# Altium PCB PCB1.PcbDoc
Units mil, origin at the board's own origin, x right, y up, seen from the top; angles counter-clockwise.
Board outline 1195 x 1580 mil, 2 copper layers (Top Layer, Bottom Layer); 29 components, 20 nets, 171 pads, 89 vias.
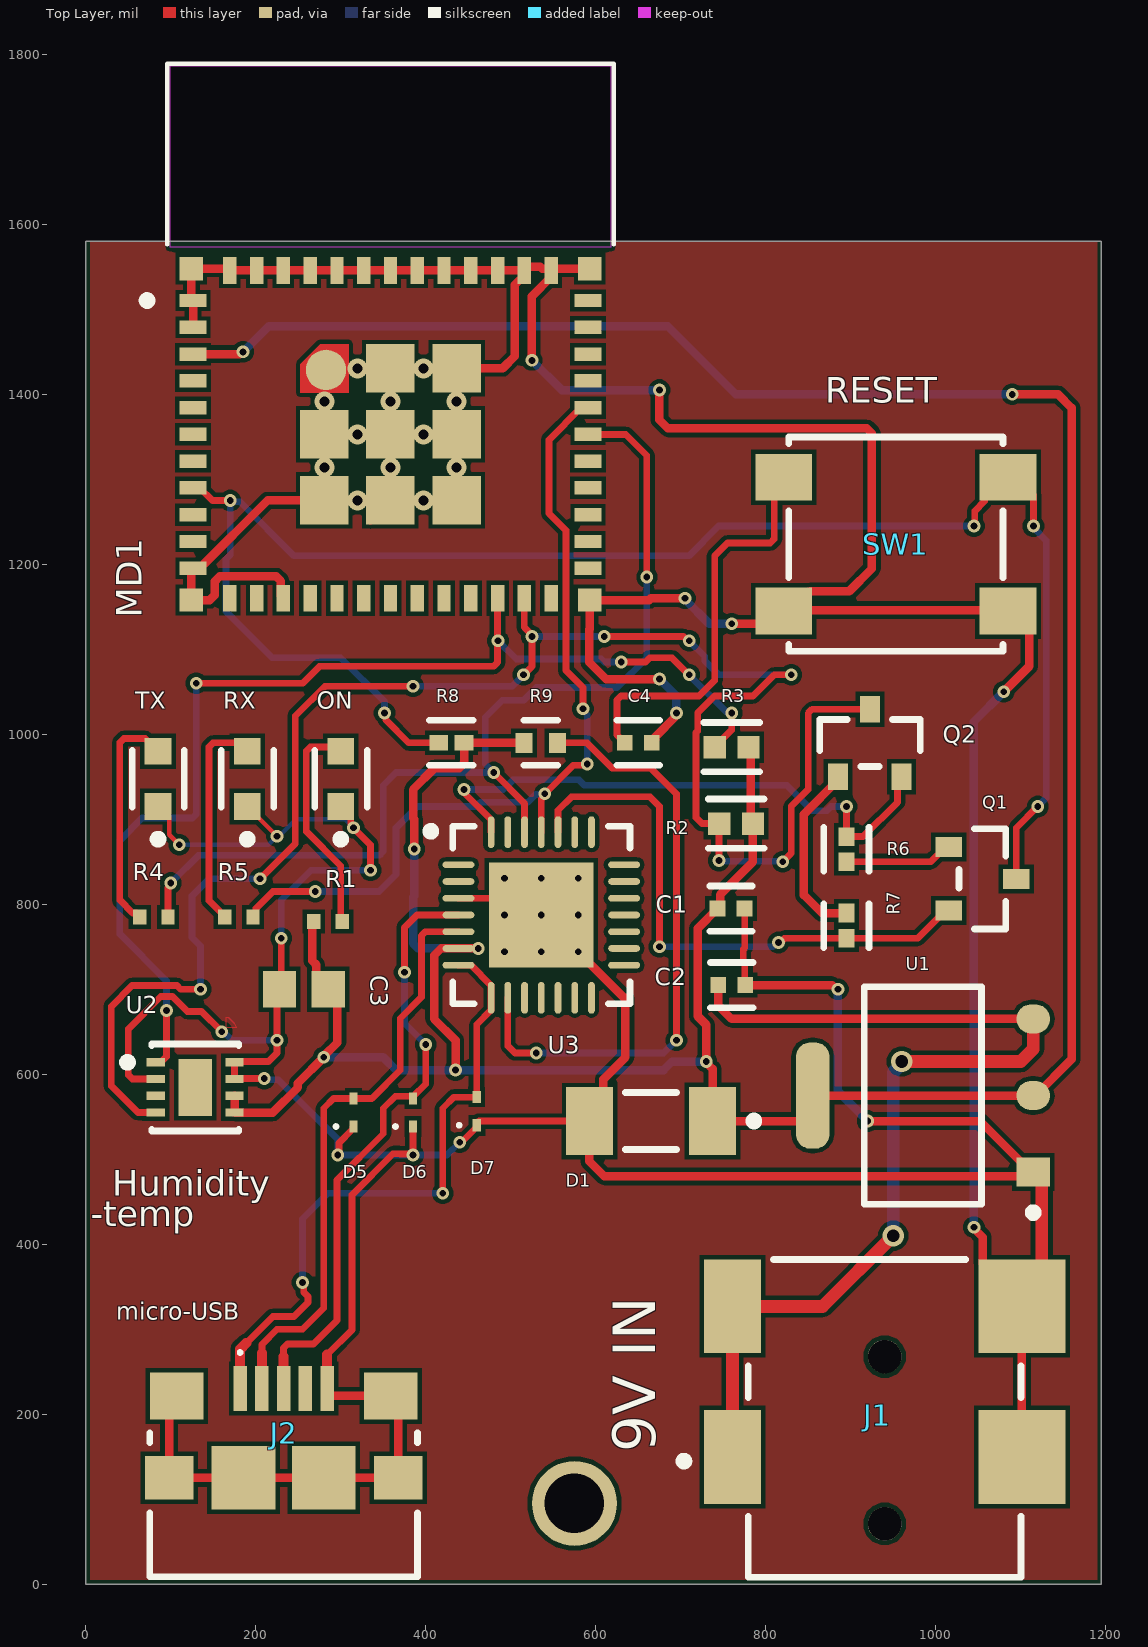
[diagram p0: Top Layer view]
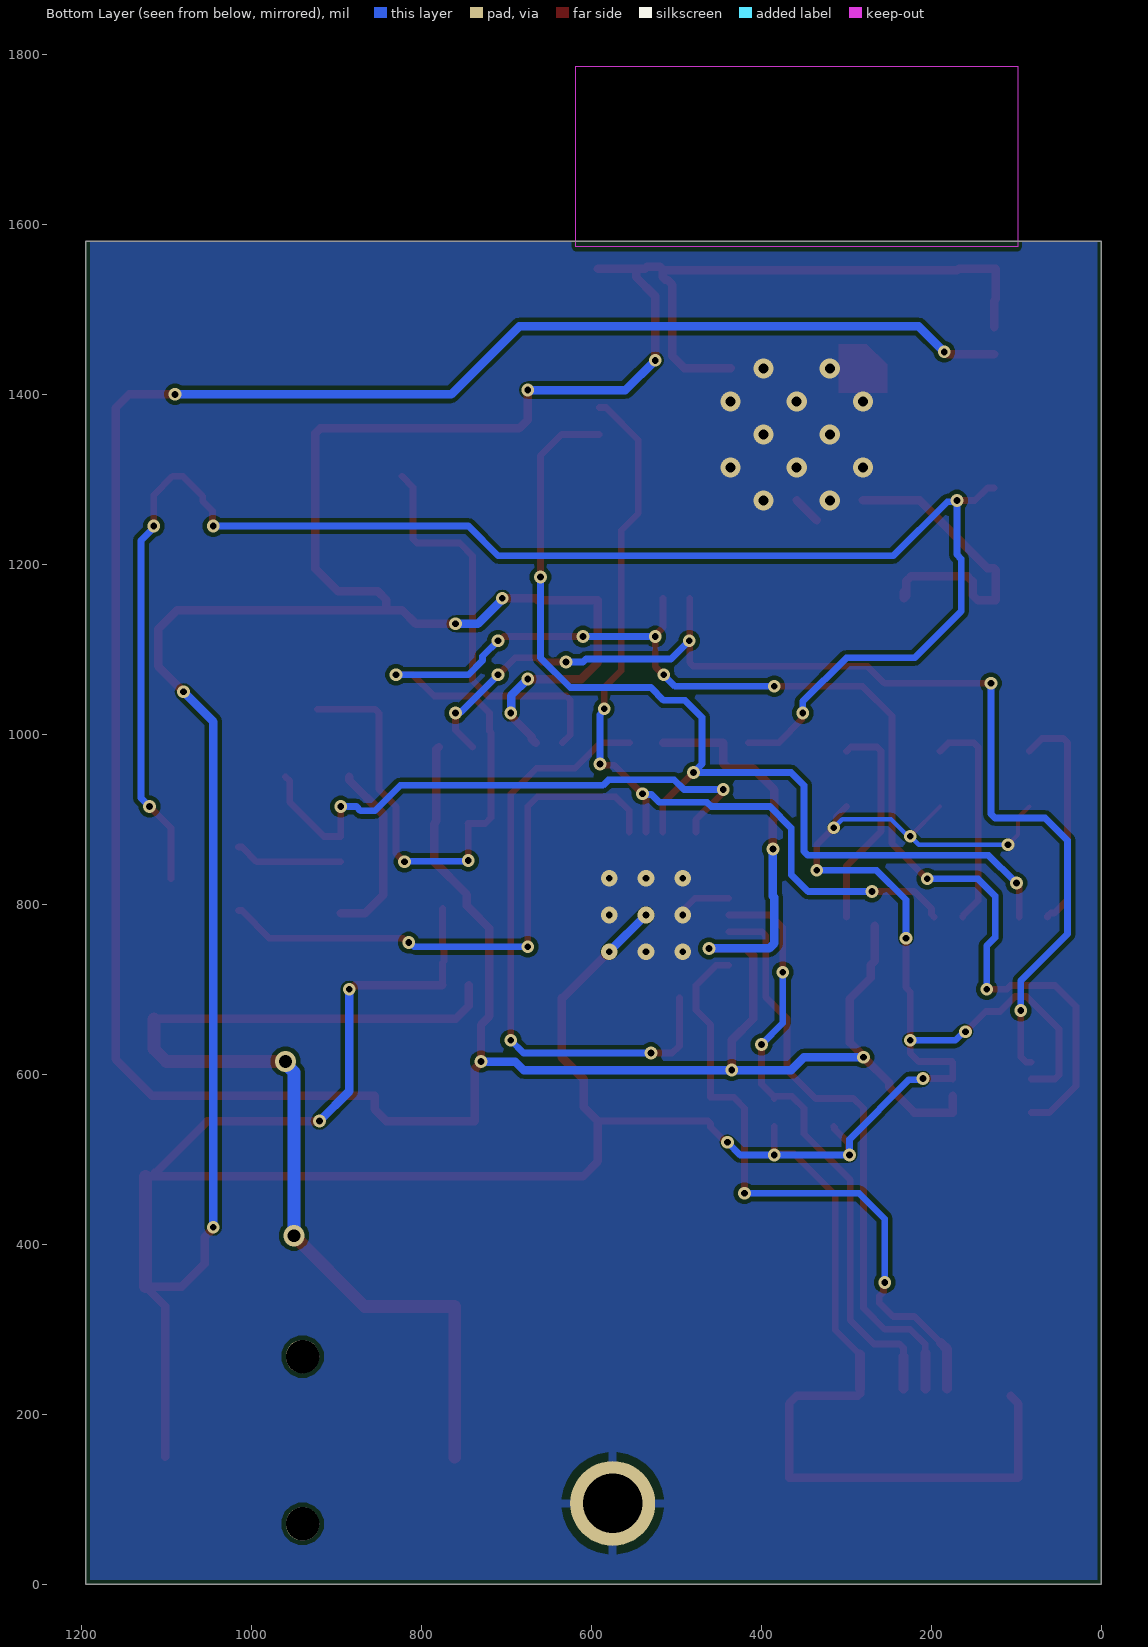
[diagram p1: Bottom Layer view, seen from below]
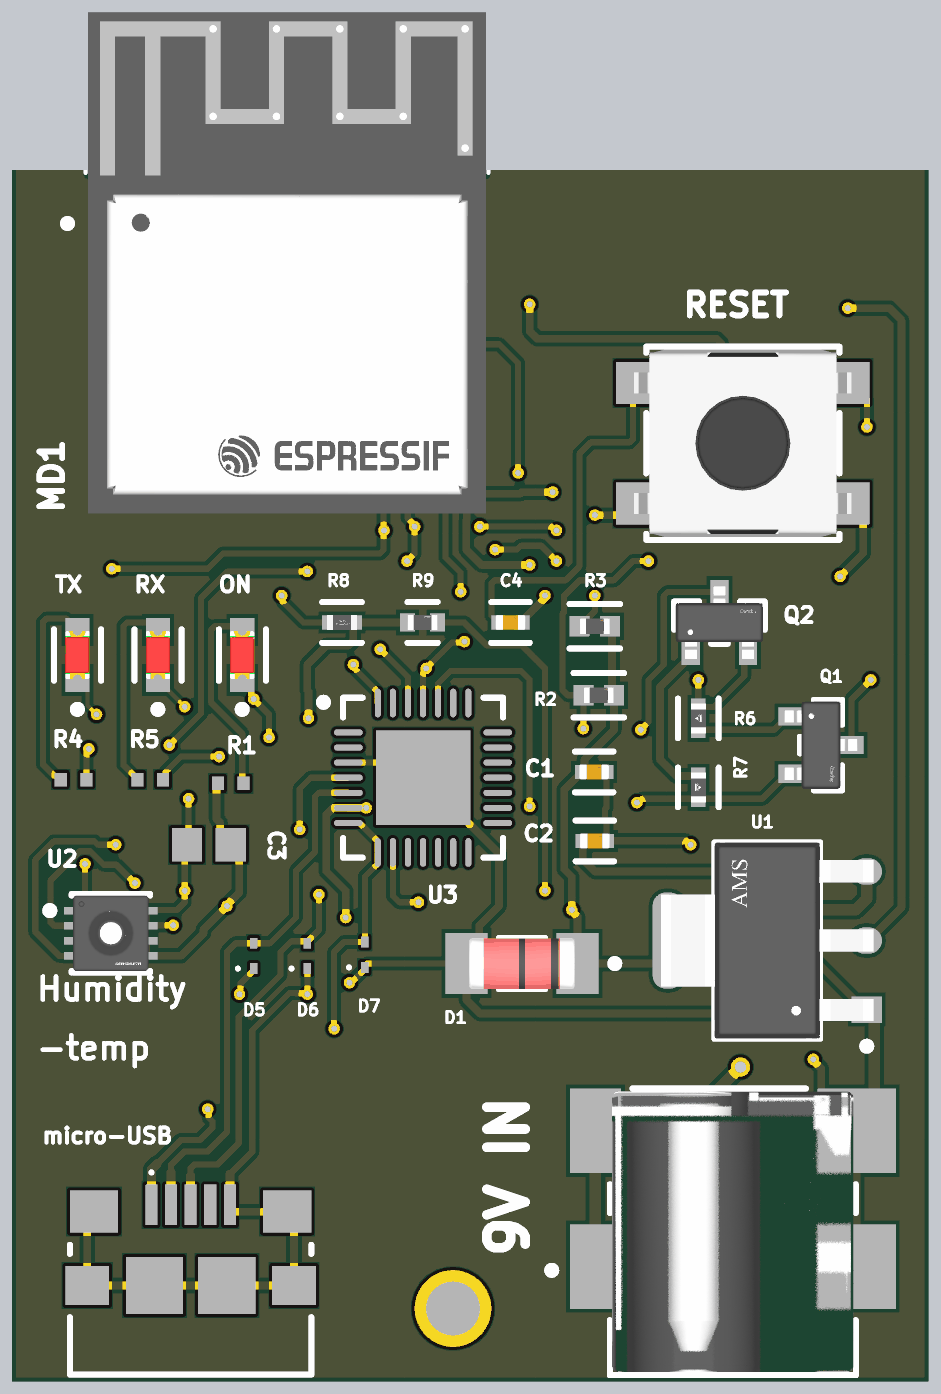
[diagram p2: 3D render of the assembled board from above, using the file's embedded part models]

## Layer stack, top to bottom
Top Solder: solder mask 0.4, Solder Resist, Dk 3.5
Top Layer: signal copper 1.4
Dielectric 1: dielectric 12.6, FR-4, Dk 4.8
Bottom Layer: signal copper 1.4
Bottom Solder: solder mask 0.4, Solder Resist, Dk 3.5

## Board outline
0,0 1195,0 1195,1580 0,1580

## Design rules (kind name [scope] priority, off if disabled: settings)
Clearance Clearance_2 [InNamedPolygon('Bottom Layer-No Net') vs InNet('No Net') And OnLayer('Top Layer')] p1: gap=5 ignorepadtopadclearanceinfootprint=FALSE
Clearance Clearance_1 [InNamedPolygon('Bottom Layer-No Net')] p2: gap=5 ignorepadtopadclearanceinfootprint=FALSE
Clearance [All] p3: gap=5 ignorepadtopadclearanceinfootprint=FALSE
PlaneClearance [InPadClass('All Pads')] p1: clearance=20
PlaneConnect [All] p1: planeconnectstyle=Direct reliefexpansion=20 reliefentries=4 reliefconductorwidth=10 reliefairgap=10
PolygonConnect [All] p1: connectstyle=NoConnect reliefconductorwidth=10 reliefentries=4 polygonreliefangle="90 Angle" airgapwidth=10
RoutingPriority [InNet('3.3v')] p1: routingpriority=0
RoutingVias [All] p1: holewidth=20 width=30 viastyle="Through Hole" minholewidth=5 minwidth=10 maxholewidth=30 maxwidth=50
SolderMaskExpansion [All] p1: expansion=4 istentingtop=FALSE
SupplyNets "Schematic Supply Nets" [InNet('GND')] p1: voltage=0.000
UnpouredPolygon [All] p1: allowunpoured=TRUE
Width [All] p1: maxlimit=100 minlimit=5 preferedwidth=10 minimp=50.000000 maximp=50.000000 favimp=50.000000
26 further rules are at their usual default settings.

## Components (designator, comment, footprint, x,y, rotation, side; value= is the part's Value field where it differs from the comment)
C1 "0.1uf" FP-0402B104K160CT-IPC_C 759.13,795 r0 top
C2 "0402B104K160CT" FP-0402B104K160CT-IPC_C 760,705 r0 top
C3 "0.1uf" CAPC1608X87X35ML15T15 256.46,700 r0 top
C4 "0.1uf" FP-0402B104K160CT-IPC_C 650,990 r0 top
D1 "JANTX1N746AUR-1" FP-DO-213AA-MFG 665,545 r180 top
D5 "ESD9B5.0ST5G" ONSC-SOD-923-2-514AB-01_V 315,555 r90 top
D6 "ESD9B5.0ST5G" ONSC-SOD-923-2-514AB-01_V 385,555 r90 top
D7 "ESD9B5.0ST5G" ONSC-SOD-923-2-514AB-01_V 460,556.54 r90 top
J1 "PJ-018H-SMT-TR" FP-PJ-018H-SMT-TR-MFG 940,195 r90 top
J2 "1981568-1" TECO-1981568-5_V 232.76,230.32 r0 top
MD1 "ESP32-C3-MINI-1-N4" FP-ESP32-C3-MINI-1-N4-MFG 358.5,1352.91 r0 top
ON "SML-D12U1WT86" FP-SML-D12-MFG 300,947.48 r90 top (schematic designator D2)
Q1 "SS8050-G" FP-SS8050-G-MFG 1055,830 r0 top
Q2 "SS8050-G" FP-SS8050-G-MFG 922.6,989.76 r90 top
R1 "RL0510S-R15-F" RESC1005X45X15LL05T10 285,780 r0 top
R2 "4.7K" FP-TFCR0402-IPC_A 765.17,895 r0 top
R3 "4.7K" FP-TFCR0402-IPC_A 760,985 r0 top
R4 "" RESC1005X45X15LL05T10 80,785 r180 top
R5 "RL0510S-R15-F" RESC1005X45X15LL05T10 180,785 r180 top
R6 "10K" FP-CRCW0402-C-e3-IPC_C 895,864.81 r270 top
R7 "10K" FP-CRCW0402-C-e3-IPC_C 895,774.81 r90 top
R8 "CRGCQ0402J10K" FP-CRGCQ0402-IPC_C 430.19,990 r0 top value=10KΩ
R9 "4.7k" FP-RC0402-0_4-MFG 535.32,990 r0 top
RX "SML-D12U1WT86" FP-SML-D12-MFG 190,947.48 r90 top (schematic designator D4)
SW1 "430473035826" 430473035826 953.11,1223.74 r180 top
TX "SML-D12U1WT86" FP-SML-D12-MFG 85,947.48 r90 top (schematic designator D3)
U1 "AMS1117-3.3" FP-AMS1117-IPC_C 985,575 r180 top
U2 "SHT30-DIS-B2.5KS" FP-SHT30-DIS-B2_5KS-MFG 128.74,584.53 r0 top
U3 "CP2102-GMR" SLAB-QFN-28-3125x3125TP_M 535.94,787.44 r0 top

## Footprints (in the part's own frame and the unit in brackets; to place one, negate y for a bottom-side part, rotate by r counter-clockwise, add the part's x,y. Pads: shape width x height; smd on the part's side, far side on the other; paste and mask are expansions set on the pad)
430473035826 [mm] "SMD Tact Switch, body 6x6mm"
  rect 1.7x1.4 smd: A1(-3.35,2) A2(3.35,2) B1(-3.35,-2) B2(3.35,-2)
  silkscreen extent -3.2,-3.2 3.2,3.2, body extent -3.6,-3.1 3.6,3.1, height 3.5
CAPC1608X87X35ML15T15 [mm] "Chip Capacitor, 2-Leads, Body 1.60x0.80mm, IPC Low Density"
  rect 1x1.1 smd: 1(-0.725,0) 2(0.725,0)
  body extent -0.87,-0.48 0.87,0.47, height 0.87
FP-0402B104K160CT-IPC_C [mil]
  rect 18.36x18.6 smd paste+0 mask+0: 1(-15.87,0) 2(15.87,0)
  silkscreen extent -25,-27 25,27, body extent -29,-15 29,15, height 10
FP-AMS1117-IPC_C [mm]
  rect 1.004x0.872 smd paste+0 mask+0: 1(-3.295,2.29)
  rrect100% 1.004x0.872 smd paste+0 mask+0: 2(-3.295,0) 3(-3.295,-2.29)
  rrect87% 1.004x3.182 smd paste+0 mask+0: 4(3.295,0)
  silkscreen extent -3.42,-3.25 1.75,3.62, body extent -3.9,-3.35 3.9,3.35, height 0.25
FP-CRCW0402-C-e3-IPC_C [mil]
  rect 22.03x18.6 smd paste+0 mask+0: 1(-14.81,0) 2(14.81,0)
  silkscreen extent -26,-27 26,27, body extent -30,-15 30,15, height 10
FP-CRGCQ0402-IPC_C [mil]
  rect 22.03x18.6 smd paste+0 mask+0: 1(-14.81,0) 2(14.81,0)
  silkscreen extent -26,-27 26,27, body extent -30,-15 30,15, height 10
FP-DO-213AA-MFG [mm]
  rect 1.4x2.03 smd paste+0 mask+0: 1(-1.84,0) 2(1.84,0)
  silkscreen extent -3.2,-0.85 0.76,0.85, body extent -2.64,-1.11 2.64,1.11, height 0.25
FP-ESP32-C3-MINI-1-N4-MFG [mm]
  rect 0.8x0.4 smd paste+0 mask+0: 1(-5.9,4) 2(-5.9,3.2) 3(-5.9,2.4) 4(-5.9,1.6) 5(-5.9,0.8) 6(-5.9,0) 7(-5.9,-0.8) 8(-5.9,-1.6) 9(-5.9,-2.4) 10(-5.9,-3.2) 11(-5.9,-4) 25(5.9,-4) 26(5.9,-3.2) 27(5.9,-2.4) 28(5.9,-1.6) 29(5.9,-0.8) 30(5.9,0) 31(5.9,0.8) 32(5.9,1.6) 33(5.9,2.4) 34(5.9,3.2) 35(5.9,4)
  rect 0.4x0.8 smd paste+0 mask+0: 12(-4.8,-4.9) 13(-4,-4.9) 14(-3.2,-4.9) 15(-2.4,-4.9) 16(-1.6,-4.9) 17(-0.8,-4.9) 18(0,-4.9) 19(0.8,-4.9) 20(1.6,-4.9) 21(2.4,-4.9) 22(3.2,-4.9) 23(4,-4.9) 24(4.8,-4.9) 36(4.8,4.9) 37(4,4.9) 38(3.2,4.9) 39(2.4,4.9) 40(1.6,4.9) 41(0.8,4.9) 42(0,4.9) 43(-0.8,4.9) 44(-1.6,4.9) 45(-2.4,4.9) 46(-3.2,4.9) 47(-4,4.9) 48(-4.8,4.9)
  rect 1.45x1.45 smd paste+0 mask+0: 49(-1.975,-1.975) 49(-1.975,0) 49(0,-1.975) 49(0,0) 49(0,1.975) 49(1.975,-1.975) 49(1.975,0) 49(1.975,1.975)
  round 1.207 smd paste+0 mask+0: 49(-1.926,1.926)
  rect 0.7x0.7 smd paste+0 mask+0: 50(5.95,4.95) 51(5.95,-4.95) 52(-5.95,-4.95) 53(-5.95,4.95)
  Top Layer region: -2.7,1.25 -2.7,2.1 -2.1,2.7 -1.25,2.7 -1.25,1.25
  Keep-Out Layer region: -6.6,5.6 6.6,5.6 6.6,11 -6.6,11
  silkscreen extent -7.4,3.88 6.67,11.08, body extent -6.78,-5.77 6.78,11.17, height 0.25
FP-PJ-018H-SMT-TR-MFG [mm]
  rect 2.8x1.7 smd paste+0 mask+0: 1(-1.15,4.55) 1(3.35,4.55)
  rect 2.8x2.6 smd paste+0 mask+0: 2(-1.15,-4.1) 3(3.35,-4.1)
  round 1 hole 1 unplated paste-2539.97 mask+0: ""(-3.15,0) ""(1.85,0)
  silkscreen extent -4.75,-4.08 4.75,6.12, body extent -4.85,-5.5 4.85,5.5, height 0.25
FP-RC0402-0_4-MFG [mm]
  rect 0.5x0.6 smd paste+0 mask+0: 1(-0.5,0) 2(0.5,0)
  silkscreen extent -0.5,-0.67 0.5,0.67, body extent -0.85,-0.4 0.85,0.4, height 0.25
FP-SHT30-DIS-B2_5KS-MFG [mm]
  rect 0.55x0.25 smd paste-1000 mask-1000: 1(-1.175,0.75) 2(-1.175,0.25) 3(-1.175,-0.25) 4(-1.175,-0.75) 5(1.175,-0.75) 6(1.175,-0.25) 7(1.175,0.25) 8(1.175,0.75)
  rect 1x1.7 smd paste-1000 mask+0: 9(0,0)
  silkscreen extent -2.15,-1.3 1.3,1.3, body extent -1.65,-1.4 1.65,1.4, height 0.25
FP-SML-D12-MFG [mm]
  rect 0.8x0.8 smd paste+0 mask+0: 1(-0.825,0) 2(0.825,0)
  silkscreen extent -1.92,-0.79 0.85,0.78, body extent -1.33,-0.55 1.33,0.55, height 0.25
FP-SS8050-G-MFG [mm]
  rect 0.8x0.6 smd paste+0 mask+0: 1(-1.01,0.95) 2(-1.01,-0.95) 3(1.01,0)
  silkscreen extent -0.7,-1.5 0.7,1.5, body extent -1.51,-1.6 1.51,1.6, height 0.25
FP-TFCR0402-IPC_A [mil]
  rect 26.19x26.48 smd paste+0 mask+0: 1(-19.83,0) 2(19.83,0)
  silkscreen extent -33,-29 33,29, body extent -41,-21 41,21, height 10
ONSC-SOD-923-2-514AB-01_V [mm] "SOD, 2-Leads, Body 0.8x0.6mm"
  rect 0.36x0.25 smd: 1(-0.42,0) 2(0.42,0)
  silkscreen extent -0.47,0.48 -0.37,0.57, body extent -0.4,-0.3 0.4,0.3, height 0.4
RESC1005X45X15LL05T10 [mm] "Chip Resistor, 2-Leads, Body 1.00x0.50mm, IPC High Density"
  rect 0.4x0.45 smd: 1(-0.425,0) 2(0.425,0)
  body extent -0.53,-0.27 0.53,0.28, height 0.45
SLAB-QFN-28-3125x3125TP_M [mm] "QFN, 28-Leads, Body 5x5mm, Pitch 0.5mm, Thermal Pad 3.13x3.13mm, IPC Low Density"
  oval 0.95x0.2 smd: 1(-2.475,1.5) 2(-2.475,1) 3(-2.475,0.5) 4(-2.475,0) 5(-2.475,-0.5) 6(-2.475,-1) 7(-2.475,-1.5) 15(2.475,-1.5) 16(2.475,-1) 17(2.475,-0.5) 18(2.475,0) 19(2.475,0.5) 20(2.475,1) 21(2.475,1.5)
  oval 0.2x0.95 smd: 8(-1.5,-2.475) 9(-1,-2.475) 10(-0.5,-2.475) 11(0,-2.475) 12(0.5,-2.475) 13(1,-2.475) 14(1.5,-2.475) 22(1.5,2.475) 23(1,2.475) 24(0.5,2.475) 25(0,2.475) 26(-0.5,2.475) 27(-1,2.475) 28(-1.5,2.475)
  rect 3.13x3.13 smd: 29(0,0)
  silkscreen extent -3.42,-2.65 2.65,2.65, body extent -2.5,-2.5 2.5,2.5, height 1
TECO-1981568-5_V [mm] "SMD, 5-Leads, Body 8x5.9mm, Pitch 0.65mm"
  rect 0.4x1.35 smd: 1(-1.3,0) 2(-0.65,0) 3(0,0) 4(0.65,0) 5(1.3,0)
  rect 1.6x1.4 smd: 6(-3.2,-0.225) 7(3.2,-0.225)
  rect 1.45x1.3 smd: 8(-3.425,-2.675) 9(3.425,-2.675)
  rect 1.9x1.9 smd: 10(-1.2,-2.675) 11(1.2,-2.675)
  silkscreen extent -4,-5.63 4,1.12, body extent -4,-5.63 4,0.28, height 3

## Part data
C1 C2 C4: library part CMP-45632-000002-1, "CAP CER 0.1UF 16V X7R 0402", Capacitance=100nF, Case Code (Imperial)=0402, Case Code (Metric)=1005, Dielectric=X7R, Max Operating Temperature=125°C, Min Operating Temperature=-55°C, Tolerance=10%, Voltage Rating=16V, Case/Package=0402, Depth=0.5mm, Lead Free="Lead Free", Length=1mm, Packaging="Tape and Reel", Radiation Hardening=No, RoHS Compliant=Yes, Series=-, Voltage Rating (DC)=16V
C3: library part CMP-2006-03295-1, Manufacturer=Kemet, Part Number=C0603T104K3RCLTU
D1: library part CMP-00252-101805919-1, "JANTX1N746AUR-1 JANTX Series 3.3 V ±5 % 500 mW Through Hole Zener Diode - DO-213AA", Max Operating Temperature=175°C, Max Power Dissipation=500mW, Max Reverse Leakage Current=10µA, Min Operating Temperature=-65°C, Test Current=20mA, Voltage Tolerance=5%, Zener Voltage=3.3V, Element Configuration=Single, Lead Free="Contains Lead", Lifecycle Status=Production, Mount="Surface Mount", NexarPartId=101805919, Number of Pins=2, Packaging=Bulk, Power Dissipation=500mW, Radiation Hardening=No, RoHS=Compliant, Schedule B=8541100050
D5 D6 D7: library part CMP-1063-00119-1, "Transient Voltage Suppressor, Micro-Packaged Diode for ESD Protection, 2-Pin SOD-923, Pb-Free, Tape and Reel", Manufacturer="On Semiconductor", ComponentLink1Description="Manufacturer URL", ComponentLink1URL=http://www.onsemi.com/, ComponentLink2Description=Datasheet, ComponentLink2URL=http://www.onsemi.cn/pub_link/Collateral/ESD9B-D.PDF, ComponentLink3Description="Package Specification", ComponentLink3URL=http://www.onsemi.com/pub_link/Collateral/514AB.PDF, DatasheetVersion="Rev. 2", Direction=Bidirectional, IR Max (uA)=1, Mounting Technology="Surface Mount", Number of Lines=1, PackageDescription="2-Pin SOD, Body 0.8 x 0.6 mm", PackageReference=SOD-923-2-514AB-01, PackageVersion="Rev. C, 03/2011", Packing="Tape and Reel", PartNumber=ESD9B5.0ST5G, RoHS=Pb-Free, V(BR) Min (V)=5.8, VRWM Max (V)=5
J1: library part CMP-14830-000007-1, "CONN PWR JACK 1.7X4MM SOLDER", Current Rating=5A, Manufacturer=CUI, Package=0, Temperature="-25°C to +85°C", Temperature Range High=+85°C, Temperature Range Low=-25°C, Voltage Rating=24V, Automotive=No, Category=Conn, ComponentLink2Description=Datasheet, ComponentLink2URL=https://www.cuidevices.com/product/resource/pj-018h-smt-tr.pdf, Conn Gender=Male, Conn Orientation="Right Angle", Contact Material=Nickel,Silver, Device Class L1=Connectors, Device Class L2="Power Connectors", Device Class L3=unset, Digikey Description="CONN PWR JACK 1.7X4MM SOLDER", Height=5.6mm, Lead Free=Yes, Manufacturer Part Number=PJ-018H-SMT-TR, Mouser Description="DC Power Connectors Power Jacks", Number Of Contacts=1, Octopart=https://octopart.com/pj-018h-smt-tr-cui-25947163, RoHS=TRUE, Standoff Height=0.1mm
J2: library part CMP-2000-05408-1, "Micro USB Receptacle Standard Type B Assy, 5-Pin SMD, RoHS, Tape and Reel", Current Rating (Max)=1/ContactA, Manufacturer="TE Connectivity", Operating Temp Range=-55Cto85C, Operating Temperature Max Deg. C=85C, Operating Temperature Min Deg. C=-55C, Voltage Rating Max=30VAC, Body Orientation=RightAngle, Contact Material=CopperAlloy, Contact Plating=GoldOverNickel, Datasheet URL=http://www.mouser.com/ds/2/418/NG_CD_1981568_E2-621296.pdf, Datasheet Version="Rev. E2, 08/2015", Gender=RCP, Housing Material=Thermoplastic, Manufacturer URL=http://www.te.com/, Mounting Style=SurfaceMount, Number Of Contacts=5POS, Number of Ports=1Port, Number of Terminals=5, Packaging=TapeandReel, Pitch (mm)=0.65mm, Product Depth (mm)=5.6mm, Product Height (mm)=3mm, Product Length (mm)=8mm, Termination Method=Solder, Type=MicroUSB
MD1: library part CMP-10700-116589975-1, "Multiprotocol Modules SMD module, ESP32-C3FN4, PCB antenna, -40 C +85 C", Ambient Temperature Range High=85°C, Current - Receiving=84mA, Current - Transmitting=350mA, Max Frequency=2.484GHz, Max Supply Voltage=3.6V, Min Operating Temperature=-40°C, Min Supply Voltage=3V, Data Rate=150Mbps, Height=2.55mm, Interface=SPI, Max Operating Temperature=85°C, Number of GPIO=13
ON RX TX: library part CMP-08952-000009-1, "LED RED DIFFUSED 1608 SMD", Colour=Red, Forward Current=20mA, Forward Voltage=2.2V, Manufacturer=Rohm, Package=SML-D12, Power Dissipation=54mW, Reverse Voltage=5V, Temperature="-40°C to +85°C", Temperature Range High=+85°C, Temperature Range Low=-40°C, Automotive=No, Category=Diode, ComponentLink2Description=Datasheet, ComponentLink2URL=https://www.rohm.com/datasheet/SML-D12U1W/sml-d12x1-e, Device Class L1=Optoelectronics, Device Class L2=LEDs, Device Class L3=unset, Digikey Description="LED RED DIFFUSED 1608 SMD", Height=0.65mm, Lead Free=Yes, Led Orientation="Top View", Luminous Intensity=63mcd, Manufacturer Part Number=SML-D12U1WT86, Mouser Description="SML-D12 Series Red 0603 Diffused 63 mcd 2.2 V Surface Mount LED", Octopart=https://octopart.com/sml-d12u1wt86-rohm-70850259, RoHS=TRUE, Wavelength=620nm
Q1 Q2: library part CMP-20235-000001-1, "NPN TRANSISTOR 1.5A 40V SOT-23 R", Case/Package=TO-236-3, Collector Emitter Breakdown Voltage=25V, Collector Emitter Voltage (VCEO)=400mV, Max Collector Current=1.5A, Max Power Dissipation=300mW, Transition Frequency=100MHz, Max Breakdown Voltage=25V, Mount="Surface Mount", Packaging="Tape and Reel", RoHS Compliant=Yes
R1 R5: library part CMP-2002-01742-1, Manufacturer=Susumu, Part Number=RL0510S-R15-F
R2 R3: library part CMP-250906-194630-1, "RES Thin Film,  4.7kΩ, 0.5%, 0.063W, 25ppm/°C, 0402"
R4: library part CMP-2002-01742-1, Manufacturer=Susumu, Part Number=RL0510S-R15-F
R6 R7: library part CMP-02407-012085-1, "RES 10K OHM 1% 1/16W 0402", Case/Package=Molded, Max Operating Temperature=155°C, Min Operating Temperature=-55°C, Power Rating=62.5mW, Resistance=10kR, Resistor Type="Thick Film", Temperature Coefficient=100ppm/°C, Tolerance=1%, Contact Plating=Tin, Lead Free="Lead Free", Length=1mm, Mount="Surface Mount", RoHS Compliant=Yes, Termination=Wraparound
R8: library part CMP-03211-008081-1, "CRGCQ 0402 10K 5%", Ambient Temperature Range High=+70°C, Manufacturer="TE Connectivity", Package=CRGCQ0402, Power Rating=0.0625W, Resistance=10KΩ, Temperature="-55°C to +155°C", Temperature Coefficient=±100ppm/°C, Temperature Range High=+155°C, Temperature Range Low=-55°C, Tolerance=0.05, Voltage Rating=50V, Automotive=Yes, Category=Res, ComponentLink2Description=Datasheet, ComponentLink2URL=https://www.te.com/commerce/DocumentDelivery/DDEController?Action=showdoc&DocId=Data+Sheet%7F1773204-3%7F1%7Fpdf%7FEnglish%7FENG_DS_1773204-3_1.pdf%7F4-2176347-923, Composition="Thick Film", Device Class L1="Passive Components", Device Class L2=Resistors, Device Class L3="Chip SMD Resistors", Digikey Description="CRGCQ 0402 10K 5%", Height=0.4mm, Ipc Land Pattern Name=RESC10050X35, Lead Free=Yes, Manufacturer Part Number=CRGCQ0402J10K, Mouser Description="Res Thick Film 0402 10K Ohm 5% 0.063W(1/16W) ±100ppm/C Pad SMD Automotive T/R", Octopart=https://octopart.com/crgcq0402j10k-te+connectivity-91017993, RoHS=TRUE, Series=CRGCQ
R9: library part CMP-2002-08011-2, Case Code (Imperial)=0402, Max Operating Temperature=155°C, Max Power Dissipation=63mW, Min Operating Temperature=-55°C, Resistance=4.7kΩ, Temperature Coefficient=100ppm/°C, Tolerance=5%, Voltage Rating=50V, Case/Package=0402, Composition="Thick Film", Depth=500µm, Features="Moisture Resistant", Height=350µm, Lead Free="Lead Free", Length=1mm, Military Standard=Not, Number of Pins=2, Number of Terminations=2, Packaging="Tape & Reel", Power Rating=63mW, REACH SVHC="No SVHC", RoHS=Compliant, Schedule B="8533210045, 8533210045", Termination=SMD/SMT, Voltage Rating (AC)=50V, Voltage Rating (DC)=50V, Width=500µm
SW1: library part CMP-1455-00006-3, "Switch Tactile Spst-no 0.05A 12V", Current Rating=50mA, Insulation Resistance=100MΩ, Max Operating Temperature=85°C, Min Operating Temperature=-40°C, Voltage Rating=12V, Actuator Material="Liquid Crystal Polymer, Polymer", Contact Plating=Silver, Height=3.5mm, Illumination Type=Non-Illuminated, Mechanical Life=500kcycles, Mount="Surface Mount", Packaging="Tape and Reel", RoHS=Compliant, Switch Function=Off-Mom, Switch Travel=250µm, Throw Configuration=SPST
U1: library part CMP-209535-000001-1, "LDO Voltage Regulators 1A, 3.3V", Dropout Voltage=1.1V, Manufacturer="Advanced Monolithic Systems", Max Junction Temp=+125°C, Max Power Dissipation=1.2W, Max Supply Voltage=15V, Nominal Supply Current=5mA, Output Current=1A, Output Voltage=3.3V, Package=AMS1117, Temperature="-40°C to +125°C", Temperature Range Low=-40°C, Automotive=No, Category=IC, ComponentLink2Description=Datasheet, ComponentLink2URL=http://www.advanced-monolithic.com/pdf/ds1117.pdf, Device Class L1="Integrated Circuits (ICs)", Device Class L2="Power Management ICs", Device Class L3="Voltage Regulators - Linear", Height=1.8mm, Ipc Land Pattern Name=SOT229P700X180-4, Lead Free=Yes, Manufacturer Part Number=AMS1117-3.3, Number Of Outputs=1, Octopart=https://octopart.com/ams1117-3.3-advanced+monolithic+systems-25899300, Output Type=Fixed, RoHS=TRUE, Standoff Height=0.64mm, Temperature Range High=+125°C
U2: library part CMP-144040-000006-1, "SENSOR HUMID/TEMP 5V I2C 3% SMD"
U3: library part CMP-2000-04924-1, "Single-Chip USB to URAT Bridge, 3.3 V, -40 to 85 degC, 28-Pin QFN, RoHS, Tape and Reel", Manufacturer="Silicon Labs", Operating Supply Voltage (Max)=3.6V, Operating Supply Voltage (Min)=3V, Operating Supply Voltage (Typ)=3.3V, Operating Temperature (Max)=85C, Operating Temperature (Min)=-40C, Operating Temperature Classification=Industrial, Package Description="28-Pin Quad-Flat No-Leads Package, Body 5 x 5 mm, Pitch 0.5 mm", Package Reference=QFN-28, Package Type=QFNEP, Supply Current=26mA, Data Rate=1000kbps, Datasheet URL=http://www.mouser.com/ds/2/368/CP2102-9-247052.pdf, Datasheet Version="Rev. 1.6, 12/2013", Interface Circuit Standard 1=RS-232, Manufacturer URL=http://www.silabs.com/, Mounting=SurfaceMount, Number of Channels=1, Package URL=http://www.silabs.com/Support%20Documents/TechnicalDocs/C8051T61x.pdf, Packaging=TapeandReel, Pin Count=28, Rad Hardened=No, Transmitter and Receiver FIFO Counter=No

## Free pads (board coordinates)
  round 100 hole 70 paste-99999: 2(575,95)

## Via types
v1: diameter 15, hole 8, Top Layer to Bottom Layer, 66 vias
v2: diameter 23.62, hole 11.81, Top Layer to Bottom Layer, 12 vias
v3: diameter 19.68, hole 7.87, Top Layer to Bottom Layer, 9 vias
v4: diameter 25, hole 15, Top Layer to Bottom Layer, 2 vias

## Nets (pads, with @x,y where several pads share a name; then routed paths per layer and width w, separated by ;. In a path a pad name is that pad's centre, name@x,y a point inside that pad or via, vN(x,y) a via of type N, cw(c..) or ccw(c..) an arc to the next point about the centre after c; other vN are vias at no path point)
3.3v: C1.1 C3.2 D1.1 MD1.3 R1.1 R2.2 R3.2 R8.2 R9.1 U1.2 U1.4 U2.5 U2.6 U3.6 | length 4210.4
  Top Layer w10: MD1.3 181.05,1447.4 183.65,1450 v1(185,1450) ; U2.6 U2.5 220,555 249.52,584.52 249.52,589.52 v1(280,620) 280,621.35 295.98,637.34 295.98,689.02 271.22,713.78 271.22,728.78 266.54,733.46 R1.1@266.54,775 ; v1(386.5,865) 386.5,899.93 385,901.43 385,935 410,960 439.14,960 445,965.86 R8.2 R9.1 ; v1(435,605) 435,640 409.8,665.2 409.8,739.8 418.07,748.07 v1(461.83,748.07) ; R3.2 782.41,982.41 782.41,897.59 R2.2 785,850 746.48,811.48 746.48,798.21 C1.1 743.27,794.88 720,771.61 720,668.18 730,658.18 v1(730,615) 730,613.65 737.44,606.21 D1.1 841.44,545 855.28,558.84 U1.4 U1.2 1117.33,575 1160,617.67 1160,1384.14 1144.14,1400 v1(1090,1400)
  Bottom Layer w10: v1(185,1450) 215,1480 685,1480 765,1400 v1(1090,1400) ; v1(280,620) 350,620 365,605 v1(435,605) 679.8,605 689.8,615 v1(730,615) ; v1(386.5,865) 386.5,809.54 385,808.04 385,753.93 390.86,748.07 v1(461.83,748.07)
"BT GPIO9": MD1.23 Q2.3 R2.1 U2.4 | length 2064.2
  Top Layer w8: U2.4 61.25,555 30,586.25 30,680 54.5,704.5 107.22,704.5 111.72,700 v1(135,700) ; v1(205,830) 246.5,871.5 246.5,1021.81 281.19,1056.5 v1(385,1056.5) ; v1(515,1070) 525,1080 525,1116.89 515.98,1125.91 MD1.23 ; v1(610,1115) 703.11,1115 708.11,1110 v1(710,1110) ; v1(745,851.5) 745,894.65 R2.1 725,895 718.08,901.92 718.08,1001.97 720,1003.89 720,1025 740,1045 785,1045 810,1070 v1(830,1070) ; v1(820,850) 830,860 830,915 850,935 850,1024.84 854.69,1029.53 Q2.3
  Bottom Layer w8: v1(135,700) 135,750.95 125,760.95 125,810 145,830 v1(205,830) ; v1(385,1056.5) 501.5,1056.5 v1(515,1070) ; v1(525,1115) v1(610,1115) ; v1(710,1110) 728.17,1091.83 728.17,1086.83 745,1070 v1(830,1070) ; v1(745,851.5) 745.75,850.75 819.25,850.75 v1(820,850)
CHIP_PU: MD1.8 Q1.3 R8.1 SW1.B1 | length 2014.1
  Top Layer w8: MD1.8 134.09,1289.92 149.02,1275 v1(170,1275) ; v1(351.5,1025) 352.84,1023.66 352.84,1017.16 380,990 R8.1 ; v1(1045,1245) 1046.05,1246.05 1046.05,1262.9 1057.43,1274.28 1057.43,1280.18 1080.98,1303.74 1086.89,1303.74 1092.8,1303.74 1115,1281.54 v1(1115,1245) ; Q1.3 1094.76,889.76 v1(1120,915)
  Bottom Layer w8: v1(351.5,1025) 351.5,1038.5 300,1090 219.69,1090 165,1144.69 165,1206.4 170,1211.4 v1(170,1275) 171.34,1273.66 181.34,1273.66 245,1210 709.69,1210 744.69,1245 v1(1045,1245) ; v1(1115,1245) 1115,1243.11 1130,1228.11 1130,925 v1(1120,915)
DTR: Q2.2 R6.1 U3.28 | length 679.4
  Top Layer w8: v1(445,935) 446.34,933.66 446.34,930.07 476.89,899.52 U3.28 ; v1(895,915) R6.1 914.63,879.63 955,920 955,945 Q2.2
  Bottom Layer w8: v1(445,935) 491.11,935 502.61,946.5 580.17,946.5 586.67,940 825,940 855,910 871.55,910 876.55,915 v1(895,915)
GND: C1.2 C2.2 C3.1 C4.2 D1.2 D5.1 D6.1 D7.1 J1.2 J1.3 J2.5 J2.6 J2.7 J2.8 J2.9 J2.10 J2.11 MD1.1 MD1.2 MD1.11 MD1.14 MD1.36 MD1.37 MD1.38 MD1.39 MD1.40 MD1.41 MD1.42 MD1.43 MD1.44 MD1.45 MD1.46 MD1.47 MD1.48 MD1.49 MD1.50 MD1.51 MD1.52 MD1.53 ON.1 pad.2 RX.1 SW1.A1 SW1.A2 TX.1 U1.1 U2.2 U2.7 U2.8 U3.3 U3.29 | length 8062.7
  Top Layer w5: TX.1 98.25,901.75 98.25,881.75 v1(110,870) ; RX.1 v1(225,880)
  Top Layer w8: U2.2 54.69,594.37 50,599.06 50,653.33 88.17,691.5 101.83,691.5 119.41,673.92 136.08,673.92 v1(160,650) ; v1(210,595) 175.63,595 U2.7 U2.8 175.92,614.98 214.98,614.98 225,625 v1(225,640) 225,697.09 230,702.09 v1(230,760) ; 283.94,270 313.18,299.24 313.18,458.18 361.5,506.5 369.5,506.5 369.66,506.34 383.66,506.34 v1(385,505) D6.1 ; v1(296.5,505) 297.84,506.34 297.84,519.14 314.08,535.38 314.08,537.54 D5.1 ; ON.1 311.75,903.25 311.75,895.15 315,891.89 v1(315,890) 335,870 v1(335,840) ; U3.3 478.33,807.13 U3.29@492.64,792.82 ; v1(440,520) 441.34,521.34 443.5,521.34 460,537.83 D7.1 ; D7.1@460,542.17 462.83,545 D1.2 ; C1.2 775.43,794.57 775.43,748.77 773.5,746.83 773.5,733.17 775.43,731.23 775.43,705.43 C2.2 ; 878.11,705 883.11,700 v1(885,700) ; U1.1@1111.96,485 U1.1@1114.57,485
  Top Layer w10: J2.6 97.91,212.6 J2.8 J2.10 J2.11 J2.9 367.6,212.6 J2.7 286.81,221.46 283.94,224.33 J2.5 ; MD1.2 MD1.1 124.25,1512.36 MD1.53 167.56,1547.8 MD1.48 MD1.47 MD1.46 MD1.45 MD1.44 MD1.43 MD1.42 MD1.41 MD1.40 MD1.39 MD1.38 MD1.37 515.98,1537.95 513.11,1535.08 510.86,1535.08 505,1529.22 505,1445 490.67,1430.67 MD1.49@436.26,1430.67 ; MD1.14@232.52,1167.87 MD1.14 229.65,1162.87 229.65,1180.24 224.14,1185.75 157.51,1185.75 151.65,1179.89 151.65,1163.89 145.8,1158.03 MD1.52 124.25,1193.47 MD1.11 134.09,1195.43 213.82,1275.16 MD1.49@280.75,1275.16 ; MD1.49@334.96,1251.61 MD1.49@358.5,1275.16 ; MD1.37@515.98,1547.13 518.86,1550 535,1550 537.2,1547.8 MD1.50 ; v1(525,1440) 525,1515.47 547.48,1537.95 MD1.36 ; v3(579.25,744.13) 633.42,689.97 635,689.97 635,620 609.1,594.1 609.1,561.54 D1.2 592.56,497.44 610.16,479.84 U1.1@1124.72,479.84 ; C4.2 670.05,994.18 670.05,997.01 694.04,1021 694.04,1024.04 v1(695,1025) v1@695.96,1024.04 ; v1(675,1065) 612.11,1065 592.5,1084.61 592.5,1123.37 592.76,1123.63 MD1.51 663.03,1158.03 665,1160 v1(705,1160) ; v1(675,1405) 675,1370 685,1360 919.14,1360 925,1354.14 925,1195 898.3,1168.3 851.57,1168.3 841.26,1157.99 SW1.A2@841.26,1146.26 ; v1(760,1130) 806.85,1130 823.11,1146.26 SW1.A2@841.26,1146.26 ; C2.2 878.11,705 ; v1(920,545) 1051.96,545 U1.1@1111.96,485 ; v1(1045,420) 1045,418.65 1055.24,408.41 1055.24,377.01 1082.05,350.2 1124.72,350.2 J1.3 J1.2 ; v1(1080,1050) 1110,1080 1110,1123.7 1087.44,1146.26 SW1.A2@841.26,1146.26
  Top Layer w12: J2.5 283.94,270
  Top Layer w15: J1.3@1124.72,350.2 U1.1@1124.72,479.84
  Bottom Layer w5: v1(110,870) 215,870 v1(225,880) 227.5,880 247.5,900 305,900 v1(315,890)
  Bottom Layer w8: v1(160,650) 161.89,650 171.89,640 v1(225,640) ; v1(210,595) 211.34,593.66 226.34,593.66 296.5,523.5 v1(296.5,505) v1(385,505) 425,505 v1(440,520) ; v1(230,760) 230,805.31 264.69,840 v1(335,840)
  Bottom Layer w10: v1(525,1440) 560,1405 v1(675,1405) ; v3(535.94,787.44) v3(579.25,744.13) ; v1(675,1065) 694.5,1045.5 694.5,1025.5 v1(695,1025) ; v1(705,1160) 705,1158.65 733.65,1130 v1(760,1130) ; v1(885,700) 885,580 v1(920,545) ; v1(1045,420) 1045,1015 v1(1080,1050)
  other v2: 319.63,1275.16 397.38,1275.16 280.75,1314.04 358.5,1314.04 436.26,1314.04 319.63,1352.91 397.38,1352.91 280.75,1391.79 358.5,1391.79 436.26,1391.79 319.63,1430.67 397.38,1430.67
  other v3: 492.64,744.13 535.94,744.13 492.64,787.44 579.25,787.44 492.64,830.75 535.94,830.75 579.25,830.75
GPIO8: MD1.22 R3.1 U2.1 | length 1351.9
  Top Layer w8: U2.1 88.39,614.06 89.31,614.98 95,620.67 95,626.58 v1(95,675) ; v1(130,1060) 255,1060 275,1080 479.8,1080 484.49,1084.69 MD1.22 ; v1(630,1085) 658.45,1085 663.45,1090 690,1090 v1(710,1070) ; R3.1 740.18,985.14 760,1004.97 v1(760,1025)
  Bottom Layer w8: v1(95,675) 95,710 40,765 40,875.31 66.19,901.5 125.31,901.5 130,906.19 v1(130,1060) ; v1(485,1110) 506.5,1088.5 606.5,1088.5 610,1085 v1(630,1085) ; v1(710,1070) 753.66,1026.34 758.66,1026.34 v1(760,1025)
NetC2_1: C2.1 J1.1 U1.3 | length 1207.4
  Top Layer w10: C2.1 744.13,680.87 759.84,665.16 U1.3
  Top Layer w15: J1.1@760.87,149.72 760.87,326.89 866.89,326.89 v4(950,410) ; v4(960,615) 1100,615 1114.72,629.72 U1.3
  Bottom Layer w15: v4(950,410) 950,602.29 960,612.29 v4(960,615)
NetC4_1: C4.1 SW1.B2 | length 482.9
  Top Layer w8: C4.1 634.13,990.12 625,999.25 625,1040.31 629.69,1045 721.62,1045 740,1063.38 740,1210 755,1225 805.31,1225 810,1229.69 810,1290.63 SW1.B2@823.11,1303.74
NetD2_2: ON.2 R1.2 | length 256.6
  Top Layer w8: R1.2@300,785 300,845 259.5,885.5 259.5,980.31 264.19,985 294.96,985 ON.2
NetD3_2: R4.2 TX.2 | length 270.6
  Top Layer w8: R4.2 63.27,785.98 59.39,789.86 55.14,789.86 40,805 40,990.31 44.69,995 69.96,995 TX.2
NetD4_2: R5.2 RX.2 | length 259
  Top Layer w8: R5.2 163.27,785.98 145,804.25 145,985.31 149.69,990 179.96,990 RX.2
NetD5_2: D5.2 J2.2 U3.5 | length 699.9
  Top Layer w8: 207.17,272.17 207.17,282.17 225,300 255,300 280,325 280,560 291.54,571.54 D5.2 336.54,571.54 370,605 370,665.72 395,690.72 395,763.07 399.69,767.76 U3.5
  Top Layer w12: J2.2 207.17,272.17
NetD6_2: D6.2 J2.3 U3.4 | length 724
  Top Layer w8: 232.76,267.76 232.76,278.07 237.44,282.76 267.76,282.76 295.47,310.47 295.47,475.47 350,530 350,560 364.08,574.08 384.08,574.08 385,573.16 D6.2 ; v1(375,720) 375,772.76 389.69,787.44 U3.4 ; D6.2@385,573.7 400,588.7 v1(400,635)
  Top Layer w12: J2.3 232.76,267.76
  Bottom Layer w8: v1(375,720) 375,660 v1(400,635)
NetD7_2: D7.2 J2.1 U3.7 U3.8 | length 759.8
  Top Layer w8: 188.82,283.82 220,315 245,315 261.5,331.5 261.5,338.61 256.34,343.77 256.34,353.66 v1(255,355) ; v1(420,460) 420,560 433.07,573.07 D7.2 460,658.47 476.89,675.36 U3.8 476.89,704.64 453.14,728.39 U3.7
  Top Layer w12: J2.1 181.57,276.57 188.82,283.82
  Bottom Layer w8: v1(255,355) 255,430 285,460 v1(420,460)
NetQ1_1: Q1.1 R6.2 | length 127.4
  Top Layer w8: R6.2 993.9,850 1011.3,867.4 Q1.1
NetQ2_1: Q2.1 R7.2 | length 214.6
  Top Layer w10: Q2.1 885.2,946.06 845,905.87 845,810.86 866.23,789.63 R7.2
NetR9_2: R9.2 U3.9 | length 719.6
  Top Layer w8: U3.9 496.57,633.43 505,625 v1(530,625) ; R9.2 589.69,990 619.69,960 665,960 695,930 v1(695,640)
  Bottom Layer w8: v1(530,625) 680,625 v1(695,640)
RTS: Q1.2 R7.1 U3.24 | length 679.5
  Top Layer w8: U3.24 555.63,910.63 571.5,926.5 663.81,926.5 675,915.31 v1(675,750) ; v1(815,755) 816.89,755 821.89,760 978.7,760 1011.3,792.6 Q1.2
  Bottom Layer w8: v1(675,750) 808.11,750 813.11,755 v1(815,755)
RX: MD1.31 R5.1 U3.25 | length 1012.4
  Top Layer w8: R5.1 200,788.27 200,795 220,815 v1(270,815) ; U3.25 535.94,924.05 540,928.11 v1(540,930) 573.66,963.66 588.66,963.66 v1(590,965) ; v1(585,1030) 585,1055 565,1075 565,1240 545,1260 545,1346.5 582.91,1384.41 MD1.31
  Bottom Layer w8: v1(270,815) 345,815 365,835 365,890 390,915 459.05,915 464.05,920 520,920 529.21,929.21 539.21,929.21 v1(540,930) ; v1(585,1030) 585,1028.11 590,1023.11 v1(590,965)
TX: MD1.30 R4.1 U3.26 | length 1211.6
  Top Layer w8: R4.1 96.73,819.84 100,823.11 v1(100,825) ; v1(480,955) 516.26,918.74 U3.26 ; MD1.30 635.31,1352.91 660,1328.23 v1(660,1185)
  Bottom Layer w8: v1(100,825) 102.28,827.28 132.65,857.65 345.31,857.65 350,862.34 350,940 365,955 v1(480,955) 470,965 470,1020 490,1040 515,1040 530,1055 625,1055 660,1090 v1(660,1185)
pads on no net: J1. J2.4 MD1.4 MD1.5 MD1.6 MD1.7 MD1.9 MD1.10 MD1.12 MD1.13 MD1.15 MD1.16 MD1.17 MD1.18 MD1.19 MD1.20 MD1.21 MD1.24 MD1.25 MD1.26 MD1.27 MD1.28 MD1.29 MD1.32 MD1.33 MD1.34 MD1.35 U2.3 U2.9 U3.1 U3.2 U3.10 U3.11 U3.12 U3.13 U3.14 U3.15 U3.16 U3.17 U3.18 U3.19 U3.20 U3.21 U3.22 U3.23 U3.27

## Polygon pours and split planes (outlines as drawn)
no net on Top Layer "NONET_L01_P012" (solid, pour order 12): 5,1580 1190,1580 1190,5 5,5
GND on Top Layer "GND_L01_P011" (solid, pour order 11): 165,655 165,666.87 167.88,666.87 174.84,659.91 176.87,655
GND on Bottom Layer "GND_L02_P009" (solid, pour order 9): 5,1580 1190,1580 1190,5 5,5

## Silkscreen, mask and mechanical layers (free items; w line width, h text height)
Top Overlay:
  text "RESET" at 870,1390 h30
  text "Humidity" at 30.82,457.3 h30
  text "-temp" at 6,421 h30
  text "micro-USB" at 36,311 h20
  text "9V IN" at 670,155 h50 r90
Top Paste:
  circle w35: c575,95 r17.5
Bottom Paste:
  circle w30: c575,95 r15